# Altium PCB versi 1.0(1).PcbDoc (part 1 of 2)
Units mm, origin at the board's own origin, x right, y up, seen from the top; angles counter-clockwise.
Board outline 227.58 x 135.13 mm, 2 copper layers (Top Layer, Bottom Layer); 42 components, 49 nets, 314 pads, 39 vias.
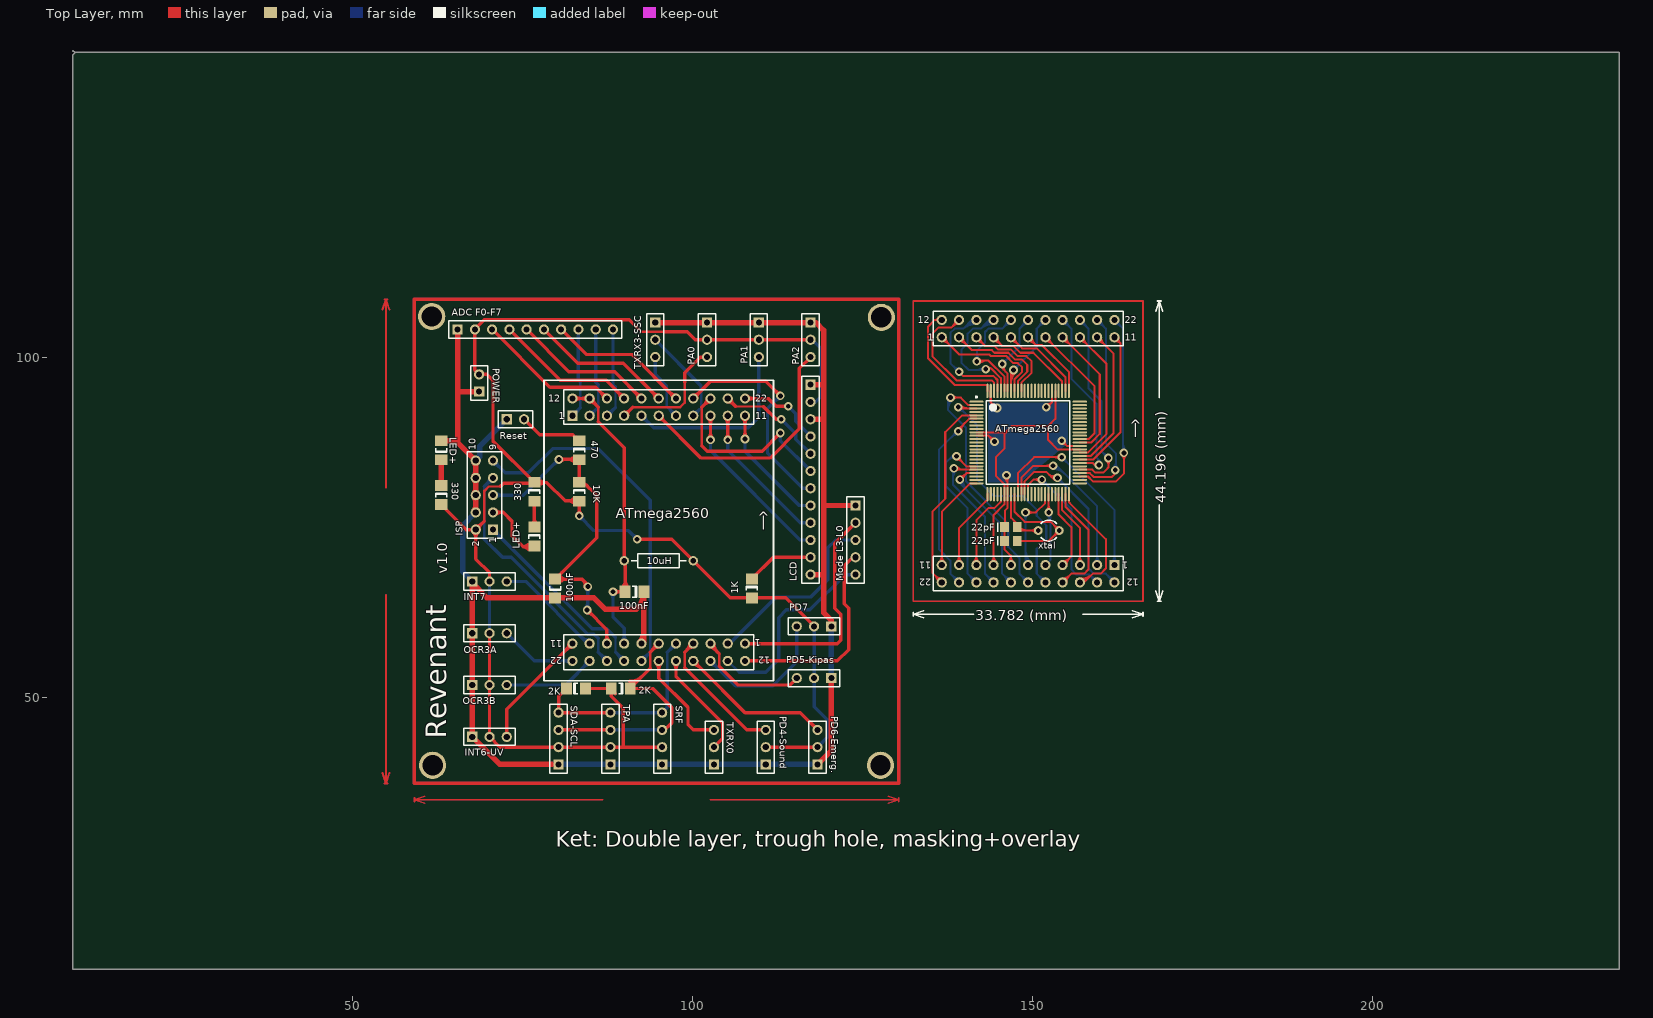
[diagram p0: Top Layer view]
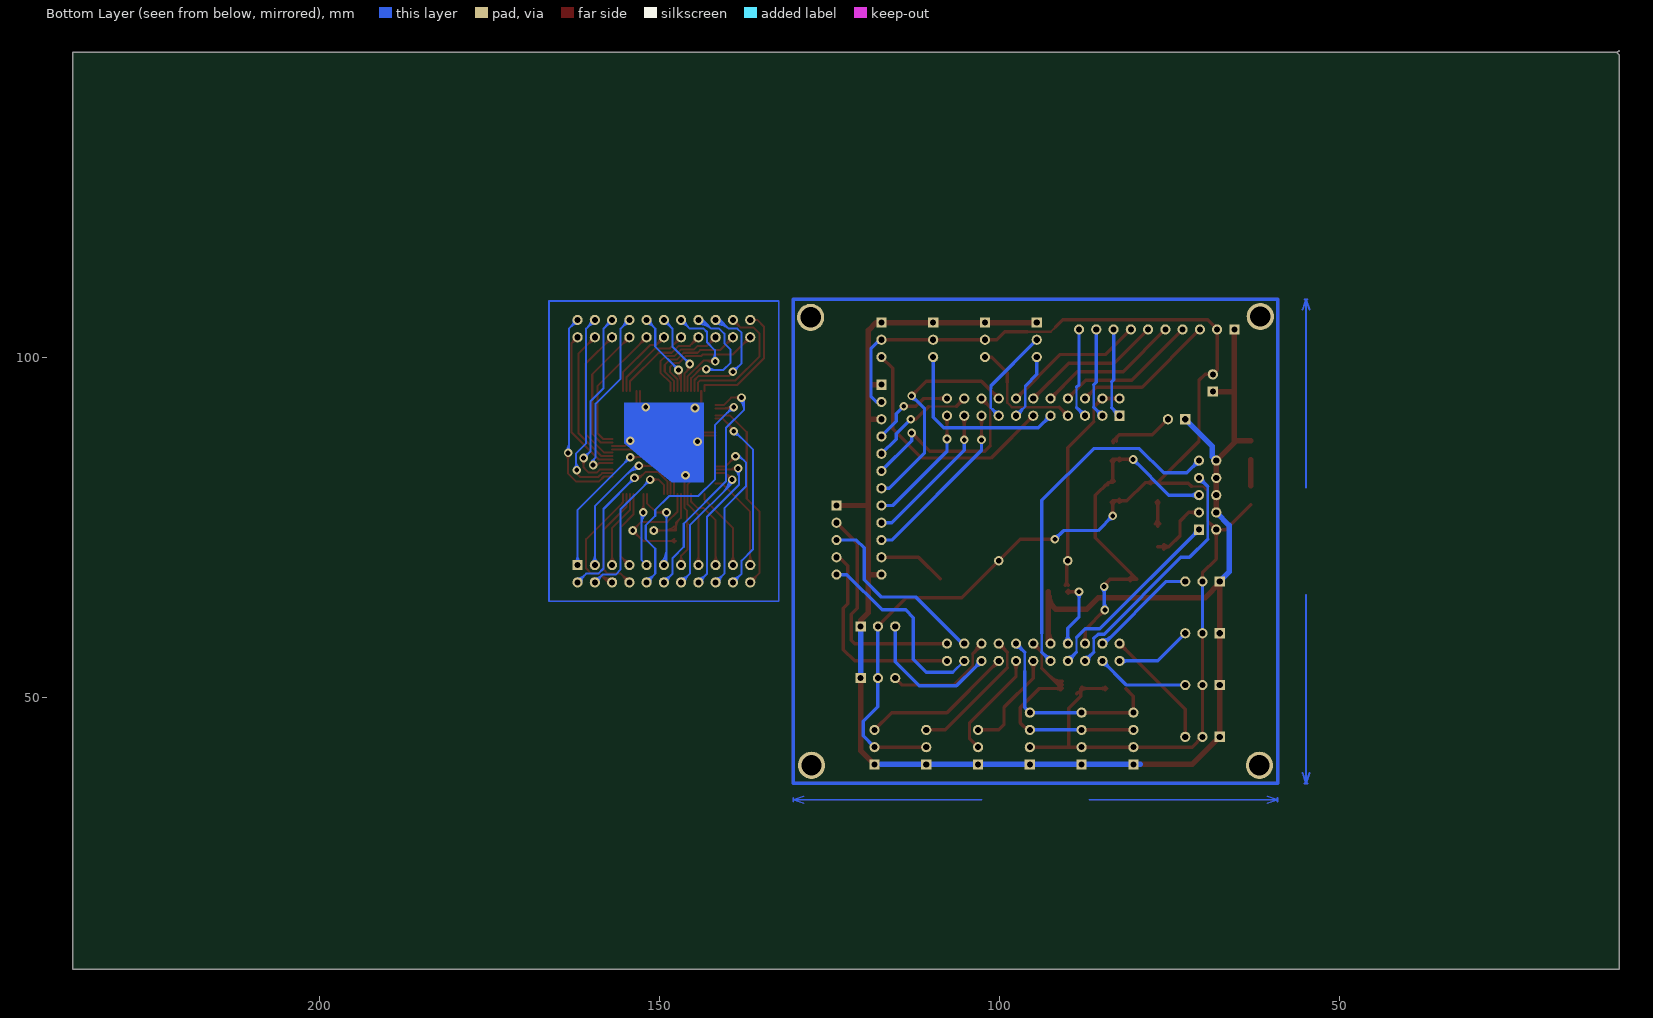
[diagram p1: Bottom Layer view, seen from below]

## Layer stack, top to bottom
Top Layer: signal copper 0.0356
Dielectric: dielectric 0.32, FR-4, Dk 4.8
Bottom Layer: signal copper 0.0356

## Board outline
9.144,144.907 8.763,144.526 8.763,10.033 236.347,10.033 236.347,144.907 9.017,144.907 8.763,145.161

## Design rules (kind name [scope] priority, off if disabled: settings)
Clearance [All] p1: gap=0.254
PolygonConnect [All] p1: connectstyle=Relief reliefconductorwidth=0.254 reliefentries=4 polygonreliefangle="90 Angle"
RoutingVias [All] p1: holewidth=0.711 width=1.27 viastyle="Through Hole" minholewidth=0.711 minwidth=1.27 maxholewidth=0.711 maxwidth=1.27
SilkscreenOverComponentPads [All] p1: minsilkscreentomaskgap=0.254
SolderMaskExpansion [All] p1: expansion=0.102
Width [All] p1: maxlimit=0.8 minlimit=0.35 preferedwidth=0.5 minimp=50.000000 maximp=50.000000 favimp=50.000000
27 further rules are at their usual default settings.

## Classes and differential pairs
component class Bawah: 100nF "ADC F0-F7" PD6-Emerg.

## Components (designator, comment, footprint, x,y, rotation, side; value= is the part's Value field where it differs from the comment)
1K "Res2" 1206 108.712,66.04 r270 top (schematic designator R.LCD)
2K "Res2" 1206 89.408,51.308 r180 top (schematic designator R.SCL)
2K "Res2" 1206 82.804,51.308 r0 top (schematic designator R.SDA)
10K "Res2" 1206 83.312,80.264 r270 top (schematic designator R.res1)
10uH "10uH" AXIAL-0.4 94.996,70.104 r0 top (schematic designator L)
22pF "" 0805 146.812,75.057 r0 top
22pF "Cap" 0805 146.812,73.025 r0 top (schematic designator 22pF1)
100nF "Cap" 1206 79.756,66.04 r90 top (schematic designator C.res)
100nF "Cap" 1206 91.44,65.532 r180 top (schematic designator C)
330 "Res2" 1206 76.708,80.264 r270 top (schematic designator R.ISP)
330 "Res2" 1206 62.992,79.756 r270 top (schematic designator R.Pow)
470 "Res2" 1206 83.312,86.36 r270 top (schematic designator R.res2)
"ADC F0-F7" "Header 10" HDR1X10 65.405,104.14 r0 top (schematic designator ADC)
ATmega2560 "ATmega2560-16AU" 100A_M 149.352,87.503 r0 top (schematic designator U1)
Header.A "Header 11X2A" HDR2X11_CEN#1 107.696,57.912 r180 top
Header.A "Header 11X2A" HDR2X11_CEN#2 162.052,69.469 r180 top
Header.B "Header 11X2A" HDR2X11_CEN#2 82.296,91.44 r0 top
Header.B "Header 11X2A" HDR2X11_CEN#1 136.652,102.997 r0 top
INT6-UV "Header 3" HDR1X3 67.564,44.196 r0 top (schematic designator UVTron)
INT7 "Header 3" HDR1X3 67.564,67.056 r0 top
ISP "ISP" HDR2X5 70.612,74.676 r90 top (schematic designator ISP_S1)
LCD "Header 12" HDR1X12 117.348,96.012 r270 top
LED+ "LED1" 1206 76.708,73.66 r270 top (schematic designator Led.ISP)
LED+ "LED1" 1206 62.992,86.36 r90 top (schematic designator Led.Pow)
"Mode L3-L0" "Header 4" HDR1X5 123.952,78.232 r270 top (schematic designator DIP.SW)
OCR3A "Header 3" HDR1X3 67.564,59.436 r0 top
OCR3B "Header 3" HDR1X3 67.564,51.816 r0 top
PA0 "Header 3" HDR1X3 102.108,105.156 r270 top
PA1 "Header 3" HDR1X3 109.728,105.156 r270 top
PA2 "Header 3" HDR1X3 117.348,105.156 r270 top
PD4-Sound "Header 3" HDR1X3 110.744,40.132 r90 top (schematic designator Sound)
PD5-Kipas "Header 3" HDR1X3 120.396,52.832 r180 top (schematic designator Kipas)
PD6-Emerg. "Header 3" HDR1X3 118.364,40.132 r90 top (schematic designator Emergency)
PD7 "Header 3" HDR1X3 120.396,60.452 r180 top
POWER "Header 2" HDR1X2 68.58,94.996 r90 top (schematic designator Switch)
Reset "SW-PB" HDR1X2 72.644,90.932 r0 top (schematic designator S1)
SDA-SCL "Header 4" HDR1X4 87.884,40.132 r90 top (schematic designator I2C)
SRF "Header 4" HDR1X4 95.504,40.132 r90 top
TPA "Header 4" HDR1X4 80.264,40.132 r90 top
TXRX0 "Header 3" HDR1X3 103.124,40.132 r90 top (schematic designator USART0)
TXRX3-SSC "Header 3" HDR1X3 94.488,105.156 r270 top (schematic designator SSC)
xtal "XTAL" BCY-W2/D3.1 152.4,74.549 r90 top (schematic designator kristal)

## Footprints (in the part's own frame and the unit in brackets; to place one, negate y for a bottom-side part, rotate by r counter-clockwise, add the part's x,y. Pads: shape width x height; smd on the part's side, far side on the other; paste and mask are expansions set on the pad)
100A_M [mm] "Thin QFP, 100-Leads, Body 14x14mm, Pitch 0.5mm, IPC Low Density"
  oval 2.1x0.3 smd: 1(-7.6,6) 2(-7.6,5.5) 3(-7.6,5) 4(-7.6,4.5) 5(-7.6,4) 6(-7.6,3.5) 7(-7.6,3) 8(-7.6,2.5) 9(-7.6,2) 10(-7.6,1.5) 11(-7.6,1) 12(-7.6,0.5) 13(-7.6,0) 14(-7.6,-0.5) 15(-7.6,-1) 16(-7.6,-1.5) 17(-7.6,-2) 18(-7.6,-2.5) 19(-7.6,-3) 20(-7.6,-3.5) 21(-7.6,-4) 22(-7.6,-4.5) 23(-7.6,-5) 24(-7.6,-5.5) 25(-7.6,-6) 51(7.6,-6) 52(7.6,-5.5) 53(7.6,-5) 54(7.6,-4.5) 55(7.6,-4) 56(7.6,-3.5) 57(7.6,-3) 58(7.6,-2.5) 59(7.6,-2) 60(7.6,-1.5) 61(7.6,-1) 62(7.6,-0.5) 63(7.6,0) 64(7.6,0.5) 65(7.6,1) 66(7.6,1.5) 67(7.6,2) 68(7.6,2.5) 69(7.6,3) 70(7.6,3.5) 71(7.6,4) 72(7.6,4.5) 73(7.6,5) 74(7.6,5.5) 75(7.6,6)
  oval 0.3x2.1 smd: 26(-6,-7.6) 27(-5.5,-7.6) 28(-5,-7.6) 29(-4.5,-7.6) 30(-4,-7.6) 31(-3.5,-7.6) 32(-3,-7.6) 33(-2.5,-7.6) 34(-2,-7.6) 35(-1.5,-7.6) 36(-1,-7.6) 37(-0.5,-7.6) 38(0,-7.6) 39(0.5,-7.6) 40(1,-7.6) 41(1.5,-7.6) 42(2,-7.6) 43(2.5,-7.6) 44(3,-7.6) 45(3.5,-7.6) 46(4,-7.6) 47(4.5,-7.6) 48(5,-7.6) 49(5.5,-7.6) 50(6,-7.6) 76(6,7.6) 77(5.5,7.6) 78(5,7.6) 79(4.5,7.6) 80(4,7.6) 81(3.5,7.6) 82(3,7.6) 83(2.5,7.6) 84(2,7.6) 85(1.5,7.6) 86(1,7.6) 87(0.5,7.6) 88(0,7.6) 89(-0.5,7.6) 90(-1,7.6) 91(-1.5,7.6) 92(-2,7.6) 93(-2.5,7.6) 94(-3,7.6) 95(-3.5,7.6) 96(-4,7.6) 97(-4.5,7.6) 98(-5,7.6) 99(-5.5,7.6) 100(-6,7.6)
  silkscreen extent -7.72,-6.15 6.15,6.82, body extent -7,-7 7,7, height 1.2
0805 [mm] "Chip Capacitor; Body 2.0 x 1.2 mm (LxW typ)"
  rect 1.3x1.5 smd: 1(-0.95,0) 2(0.95,0)
  silkscreen extent -1.9,-0.65 -1.9,0.65
1206 [mm] "Chip Capacitor; Body 3.2 x 1.6 mm (LxW typ)"
  rect 1.6x1.8 smd: 1(-1.4,0) 2(1.4,0)
  silkscreen extent -0.3,-0.8 0.3,0.8
AXIAL-0.4 [mm] "Axial Device, Thru-Hole; 2 Leads; 0.4 in Pin Spacing"
  round 1.4 hole 0.85: 1(-5.08,0) 2(5.08,0)
  silkscreen extent -4.06,-1.02 4.06,1.02
BCY-W2/D3.1 [mm] "Crystal, Thru-Hole; 2 Leads; Body 3.1 x 8.2 mm (Dia.xH)"
  round 1.3 hole 0.7: 1(0,1.55) 2(0,-1.55)
  silkscreen extent -1.55,-1.19 1.55,1.17
HDR1X2 [mm] "Connector; Header; 2 Position"
  rect 1.5x1.5 hole 0.9: 1(0,0)
  round 1.5 hole 0.9: 2(2.54,0)
  silkscreen extent -1.27,-1.27 3.81,1.27
HDR1X3 [mm] "Connector; Header; 3 Position"
  rect 1.5x1.5 hole 0.9: 1(0,0)
  round 1.5 hole 0.9: 2(2.54,0) 3(5.08,0)
  silkscreen extent -1.27,-1.27 6.35,1.27
HDR1X4 [mm] "Connector; Header; 4 Position"
  rect 1.5x1.5 hole 0.9: 1(0,0)
  round 1.5 hole 0.9: 2(2.54,0) 3(5.08,0) 4(7.62,0)
  silkscreen extent -1.27,-1.27 8.89,1.27
HDR1X5 [mm] "Connector; Header; 5 Position"
  rect 1.5x1.5 hole 0.9: 1(0,0)
  round 1.5 hole 0.9: 2(2.54,0) 3(5.08,0) 4(7.62,0) 5(10.16,0)
  silkscreen extent -1.27,-1.27 11.43,1.27
HDR1X10 [mm] "Connector; Header; 10 Position"
  rect 1.5x1.5 hole 0.9: 1(0,0)
  round 1.5 hole 0.9: 2(2.54,0) 3(5.08,0) 4(7.62,0) 5(10.16,0) 6(12.7,0) 7(15.24,0) 8(17.78,0) 9(20.32,0) 10(22.86,0)
  silkscreen extent -1.27,-1.27 24.13,1.27
HDR1X12 [mm] "Connector; Header; 12 Position"
  rect 1.5x1.5 hole 0.9: 1(0,0)
  round 1.5 hole 0.9: 2(2.54,0) 3(5.08,0) 4(7.62,0) 5(10.16,0) 6(12.7,0) 7(15.24,0) 8(17.78,0) 9(20.32,0) 10(22.86,0) 11(25.4,0) 12(27.94,0)
  silkscreen extent -1.27,-1.27 29.21,1.27
HDR2X5 [mm] "Connector; Header; 5x2 Position"
  rect 1.5x1.5 hole 0.9: 1(0,0)
  round 1.5 hole 0.9: 2(0,2.54) 3(2.54,0) 4(2.54,2.54) 5(5.08,0) 6(5.08,2.54) 7(7.62,0) 8(7.62,2.54) 9(10.16,0) 10(10.16,2.54)
  silkscreen extent -1.27,-1.27 11.43,3.81
HDR2X11_CEN#1 [mm] "Connector; Header; 11x2 Position"
  round 1.5 hole 0.9: 1(0,0) 2(2.54,0) 3(5.08,0) 4(7.62,0) 5(10.16,0) 6(12.7,0) 7(15.24,0) 8(17.78,0) 9(20.32,0) 10(22.86,0) 11(25.4,0) 12(0,2.54) 13(2.54,2.54) 14(5.08,2.54) 15(7.62,2.54) 16(10.16,2.54) 17(12.7,2.54) 18(15.24,2.54) 19(17.78,2.54) 20(20.32,2.54) 21(22.86,2.54) 22(25.4,2.54)
  silkscreen extent -1.27,-1.27 26.67,3.81
HDR2X11_CEN#2 [mm] "Connector; Header; 11x2 Position"
  rect 1.5x1.5 hole 0.9: 1(0,0)
  round 1.5 hole 0.9: 2(2.54,0) 3(5.08,0) 4(7.62,0) 5(10.16,0) 6(12.7,0) 7(15.24,0) 8(17.78,0) 9(20.32,0) 10(22.86,0) 11(25.4,0) 12(0,2.54) 13(2.54,2.54) 14(5.08,2.54) 15(7.62,2.54) 16(10.16,2.54) 17(12.7,2.54) 18(15.24,2.54) 19(17.78,2.54) 20(20.32,2.54) 21(22.86,2.54) 22(25.4,2.54)
  silkscreen extent -1.27,-1.27 26.67,3.81

## Part data
1K 2K 2K 10K 330 330 470: "Resistor"
10uH: library part INDUCTOR
22pF: library part Cap, "Capacitor"
22pF 100nF 100nF: "Capacitor"
"ADC F0-F7": "Header, 10-Pin"
ATmega2560: "8-bit AVR Microcontroller, 4.5-5.5V, 256KB Flash, 4KB EEPROM, 8KB SRAM, 86 GPIO pins, 100-pin TQFP, Industrial Grade (-40°C to 85°C), Pb-Free"
Header.A Header.A Header.B Header.B: "Header, 11-Pin, Dual row"
INT6-UV INT7 OCR3A OCR3B PA0 PA1 PA2 PD4-Sound PD5-Kipas PD6-Emerg. PD7 TXRX0 TXRX3-SSC: "Header, 3-Pin"
ISP: library part "Header 5X2", "Header, 5-Pin, Dual row"
LCD: "Header, 12-Pin"
LED+ LED+: "Typical RED GaAs LED"
"Mode L3-L0" SDA-SCL SRF TPA: "Header, 4-Pin"
POWER: "Header, 2-Pin"
Reset: "Switch"
xtal: "Crystal Oscillator"

## Free pads (board coordinates)
  round 4 hole 3: 2(61.595,106.045) 2(61.722,40.005) 2(127.635,40.005) 2(127.762,105.918)

## Via types
v1: diameter 1.27, hole 0.711, Top Layer to Bottom Layer, 39 vias

## Nets (pads, with @x,y where several pads share a name; then routed paths per layer and width w, separated by ;. In a path a pad name is that pad's centre, name@x,y a point inside that pad or via, vN(x,y) a via of type N, cw(c..) or ccw(c..) an arc to the next point about the centre after c; other vN are vias at no path point)
GND: 100nF.1 "ADC F0-F7.1" "Mode L3-L0.1" Header.A.7@92.456,57.912 INT6-UV.1 INT7.1 ISP.4 ISP.6 ISP.8 ISP.10 LCD.1 LCD.3 LCD.12 LED+.2@62.992,87.76 OCR3A.1 OCR3B.1 PA0.1 PA1.1 PA2.1 PD4-Sound.1 PD5-Kipas.1 PD6-Emerg..1 PD7.1 POWER.1 Reset.1 SDA-SCL.1 SRF.1 TPA.1 TXRX0.1 TXRX3-SSC.1 | length 275.1
  Top Layer w0.8: LED+.2@62.992,87.76 65.148,87.76 65.405,87.503 ; 65.405,104.14 65.405,94.996 ; INT7.1@67.564,67.056 INT7.1@67.564,66.802 ; ISP.4@67.825,77.463 ccw(c67.227,78.061) 68.072,78.061 ccw(c68.917,78.061) ISP.4@68.319,77.463 ; ISP.6@67.825,79.509 cw(c67.227,78.911) 68.072,78.911 cw(c68.917,78.911) ISP.6@68.319,79.509 ; ISP.6@67.825,80.003 ccw(c67.227,80.601) 68.072,80.601 ccw(c68.917,80.601) ISP.6@68.319,80.003 ; ISP.8@67.825,82.049 cw(c67.227,81.451) 68.072,81.451 cw(c68.917,81.451) ISP.8@68.319,82.049 ; ISP.8@67.825,82.543 ccw(c67.227,83.141) 68.072,83.141 ccw(c68.917,83.141) ISP.8@68.319,82.543 ; ISP.10@67.825,84.589 cw(c67.227,83.991) 68.072,83.991 cw(c68.917,83.991) ISP.10@68.319,84.589 ; ISP.4@68.072,77.216 ISP.6@68.072,79.756 ISP.8@68.072,82.296 ISP.10@68.072,84.836 65.405,87.503 ; POWER.1@68.58,94.996 65.405,94.996 ; 79.248,40.132 71.628,40.132 INT6-UV.1@67.564,44.196 OCR3B.1@67.564,51.816 OCR3A.1@67.564,59.436 INT7.1@67.564,66.802 ; 92.043,63.341 ccw(c90.602,64.782) 100nF.1@92.64,64.782 ; Header.A.7@92.209,58.159 ccw(c90.805,59.563) 92.79,59.563 ; Header.A.7@92.456,57.912 92.79,58.246 92.79,64.088 ; 100nF.1@92.79,65.532 92.79,64.088 ; TXRX3-SSC.1@94.488,105.156 PA0.1@102.108,105.156 PA1.1@109.728,105.156 PA2.1@117.348,105.156 118.11,105.156 119.253,104.013 119.253,96.139 ; LCD.12@117.348,68.072 119.126,68.072 119.253,67.945 ; LCD.3@117.348,90.932 119.253,90.932 ; LCD.1@117.348,96.012 119.126,96.012 119.253,96.139 ; PD6-Emerg..1@118.364,40.132 120.396,42.164 PD5-Kipas.1@120.396,52.832 ; PD7.1@120.396,60.452 120.396,61.341 119.253,62.484 119.253,67.945 ; 123.952,78.232 119.253,78.232 ; 65.405,87.503 65.405,94.996 ; INT7.1@67.564,66.802 69.676,64.69 85.424,64.69 87.122,62.992 91.694,62.992 92.79,64.088 ; 119.253,67.945 119.253,78.232 ; 119.253,78.232 119.253,90.932 ; 119.253,90.932 119.253,96.139
  Bottom Layer w0.8: INT7.1@67.564,67.056 66.167,68.453 66.167,75.311 ISP.4@68.072,77.216 ; ISP.10@68.072,85.186 ccw(c68.072,86.031) 68.669,85.433 ; ISP.10@68.422,84.836 cw(c69.267,84.836) 68.669,85.433 ; Reset.1@72.644,90.932 68.669,86.957 68.669,85.433 ; 79.248,40.132 86.868,40.132 94.488,40.132 102.108,40.132 109.728,40.132 117.348,40.132 ; PD5-Kipas.1@120.396,52.832 PD7.1@120.396,60.452
NetADC_3: "ADC F0-F7.3" Header.B.14@87.376,93.98 | length 23
  Top Layer w0.5: 70.485,104.14 78.994,95.631 85.725,95.631 Header.B.14@87.376,93.98 ; Header.B.14@86.876,93.98 ccw(c85.669,93.98) 86.522,94.834 ccw(c87.376,95.687) Header.B.14@87.376,94.48
NetADC_4: "ADC F0-F7.4" Header.B.15@89.916,93.98 | length 23
  Top Layer w0.5: 73.025,104.14 80.518,96.647 87.249,96.647 Header.B.15@89.916,93.98 ; Header.B.15@89.416,93.98 ccw(c88.209,93.98) 89.062,94.834 ccw(c89.916,95.687) Header.B.15@89.916,94.48
NetADC_5: "ADC F0-F7.5" Header.B.16@92.456,93.98 | length 23
  Top Layer w0.5: 75.565,104.14 81.788,97.917 88.519,97.917 Header.B.16@92.456,93.98 ; Header.B.16@91.956,93.98 ccw(c90.749,93.98) 91.602,94.834 ccw(c92.456,95.687) Header.B.16@92.456,94.48
NetADC_6: "ADC F0-F7.6" Header.B.17@94.996,93.98 | length 23
  Top Layer w0.5: 78.105,104.14 83.058,99.187 89.789,99.187 Header.B.17@94.996,93.98 ; Header.B.17@94.496,93.98 ccw(c93.289,93.98) 94.142,94.834 ccw(c94.996,95.687) Header.B.17@94.996,94.48
NetADC_7: "ADC F0-F7.7" Header.B.18@97.536,93.98 | length 23
  Top Layer w0.5: 80.645,104.14 84.328,100.457 91.059,100.457 Header.B.18@97.536,93.98 ; Header.B.18@97.036,93.98 ccw(c95.829,93.98) 96.682,94.834 ccw(c97.536,95.687) Header.B.18@97.536,94.48
NetADC_8: "ADC F0-F7.8" Header.B.1@82.296,91.44 | length 15.2
  Bottom Layer w0.35: 83.475,92.619 83.475,96.429
  Bottom Layer w0.5: Header.B.1@82.296,91.44 83.475,92.619 ; Header.B.1@82.296,91.94 ccw(c82.296,93.147) 83.15,92.294 ccw(c84.003,91.44) Header.B.1@82.796,91.44 ; 83.185,104.14 83.185,96.719 83.475,96.429
NetADC_9: "ADC F0-F7.9" Header.B.2@84.836,91.44 | length 15.3
  Bottom Layer w0.35: 86.106,92.71 86.106,96.012
  Bottom Layer w0.5: Header.B.2@84.836,91.44 86.106,92.71 ; Header.B.2@84.836,91.94 ccw(c84.836,93.147) 85.69,92.294 ccw(c86.543,91.44) Header.B.2@85.336,91.44 ; 85.725,104.14 85.725,96.393 86.106,96.012
NetADC_10: "ADC F0-F7.10" Header.B.3@87.376,91.44 | length 15.3
  Bottom Layer w0.35: 88.646,92.71 88.646,95.631
  Bottom Layer w0.5: Header.B.3@87.376,91.44 88.646,92.71 ; Header.B.3@87.376,91.94 ccw(c87.376,93.147) 88.23,92.294 ccw(c89.083,91.44) Header.B.3@87.876,91.44 ; 88.265,104.14 88.265,96.012 88.646,95.631
NetC.res_2: 10K.1 100nF.2@79.756,67.44 470.2 Header.A.9@87.376,57.912 ISP.5 | length 69.5
  Top Layer w0.5: 100nF.2@79.806,67.39 cw(c79.927,67.39) 100nF.2@79.841,67.475 ; 100nF.2@80.306,67.39 cw(c81.634,67.39) 80.695,68.329 ; v1(80.311,85.01) 83.312,85.01 83.312,81.614 83.994,81.614 85.852,79.756 85.852,73.486 79.756,67.39 83.74,67.39 v1@84.455,66.675 ; v1@80.583,84.738 cw(c81.24,84.081) 81.24,85.01 cw(c81.24,85.939) v1@80.583,85.282 ; 80.718,67.178 cw(c81.23,66.666) 81.23,67.39 cw(c81.23,68.114) 80.718,67.602 ; 82.35,84.798 ccw(c81.838,84.286) 81.838,85.01 ccw(c81.838,85.734) 82.35,85.222 ; 10K.1@83.1,81.826 ccw(c82.588,82.338) 83.312,82.338 ccw(c84.036,82.338) 10K.1@83.524,81.826 ; 470.2@83.1,84.798 cw(c82.588,84.286) 83.312,84.286 cw(c84.036,84.286) 470.2@83.524,84.798 ; 83.745,67.385 cw(c82.654,66.294) v1@84.197,66.294 ; 10K.1@84.062,81.314 cw(c84.062,80.754) 84.458,81.15 ; v1@84.455,62.48 cw(c84.455,61.551) 85.112,62.208 cw(c85.769,62.865) v1@84.84,62.865 ; v1(84.455,62.865) 87.376,59.944 Header.A.9@87.376,57.912 ; Header.A.9@87.022,58.266 ccw(c86.169,59.119) 87.376,59.119 ccw(c88.583,59.119) Header.A.9@87.73,58.266
  Bottom Layer w0.5: ISP.5@70.612,79.756 75.057,79.756 v1(80.311,85.01) ; ISP.5@70.966,79.402 cw(c71.819,78.549) 71.819,79.756 cw(c71.819,80.963) ISP.5@70.966,80.11 ; v1@79.926,85.01 cw(c78.997,85.01) 79.654,84.353 cw(c80.311,83.696) v1@80.311,84.625 ; v1@84.183,63.137 ccw(c83.219,64.101) 84.582,64.101 ; v1@84.31,66.022 cw(c83.653,65.365) 84.582,65.365 cw(c85.511,65.365) v1@84.854,66.022 ; v1(84.455,62.865) 84.582,62.992 v1(84.582,66.294) ; 84.582,63.488 ccw(c85.078,63.488) v1@84.727,63.137
NetC_2: 10uH.1 100nF.2@90.04,65.532 Header.A.8@89.916,57.912 Header.B.12@82.296,93.98 Header.B.13@84.836,93.98 | length 54.6
  Top Layer w0.35: 86.106,90.551 86.106,92.71
  Top Layer w0.5: Header.B.12@82.296,93.98 Header.B.13@84.836,93.98 86.106,92.71 ; Header.B.12@82.65,93.626 cw(c83.503,92.773) 83.503,93.98 cw(c83.503,95.187) Header.B.12@82.65,94.334 ; Header.B.13@84.482,93.626 ccw(c83.629,92.773) 83.629,93.98 ccw(c83.629,95.187) Header.B.13@84.482,94.334 ; Header.B.13@84.836,93.48 cw(c84.836,92.273) 85.69,93.126 cw(c86.543,93.98) Header.B.13@85.336,93.98 ; 86.106,90.551 89.877,86.78 89.916,86.741 10uH.1@89.916,70.104 90.09,69.93 90.09,67.006 ; v1(88.265,65.532) 100nF.2@90.09,65.532 ; v1@88.537,65.26 cw(c89.194,64.603) 89.194,65.532 cw(c89.194,66.461) v1@88.537,65.804 ; 100nF.2@89.878,65.32 ccw(c89.366,64.808) 89.366,65.532 ccw(c89.366,66.256) 100nF.2@89.878,65.744 ; 89.878,66.494 ccw(c89.366,67.006) 90.09,67.006 ; 90.302,66.494 cw(c90.814,67.006) 90.09,67.006
  Bottom Layer w0.5: v1@87.993,65.26 cw(c87.336,64.603) 88.265,64.603 cw(c89.194,64.603) v1@88.537,65.26 ; v1(88.265,65.532) 88.265,61.849 89.916,60.198 Header.A.8@89.916,57.912 ; Header.A.8@89.562,58.266 ccw(c88.709,59.119) 89.916,59.119 ccw(c91.123,59.119) Header.A.8@90.27,58.266
NetDIP.SW_1: "Mode L3-L0.2" Header.A.1@107.696,57.912 | length 33.2
  Top Layer w0.5: Header.A.1@107.696,57.912 121.285,57.912 121.793,58.42 121.793,62.23 120.904,63.119 120.904,72.644 123.952,75.692
NetDIP.SW_2: "Mode L3-L0.3" Header.A.2@105.156,57.912 | length 27.9
  Bottom Layer w0.5: Header.A.2@105.156,57.912 105.41,57.912 112.268,64.77 117.348,64.77 119.888,67.31 119.888,72.009 121.031,73.152 123.952,73.152
NetDIP.SW_3: "Mode L3-L0.4" Header.A.12@107.696,55.372 | length 30.7
  Top Layer w0.5: Header.A.12@107.696,55.372 121.285,55.372 122.936,57.023 122.936,63.119 122.301,63.754 122.301,69.342 123.571,70.612 123.952,70.612
NetDIP.SW_4: "Mode L3-L0.5" Header.A.13@105.156,55.372 | length 29
  Bottom Layer w0.35: Header.A.13@105.156,55.372 106.807,53.721
  Bottom Layer w0.5: 106.807,53.721 110.744,53.721 112.649,55.626 112.649,61.722 113.792,62.865 117.221,62.865 122.428,68.072 123.952,68.072
NetEmergency_3: Header.A.15@100.076,55.372 PD6-Emerg..3 | length 23.2
  Top Layer w0.5: Header.A.15@100.076,54.872 cw(c100.076,53.665) 100.93,54.518 ; Header.A.15@100.576,55.372 ccw(c101.783,55.372) 100.93,54.518 ; PD6-Emerg..3@118.364,45.212 115.824,47.752 107.696,47.752 100.93,54.518
NetHeader.A_3: Header.A.3@102.616,57.912 PD5-Kipas.3 | length 18.7
  Top Layer w0.35: 103.886,54.61 103.886,56.388
  Top Layer w0.5: Header.A.3@102.616,57.412 cw(c102.616,56.818) 103.036,57.238 ; Header.A.3@102.616,57.912 102.616,57.658 103.886,56.388 ; Header.A.3@103.116,57.912 ccw(c104.936,57.912) 103.649,56.625 ; 103.886,54.61 106.68,51.816 114.3,51.816 PD5-Kipas.3@115.316,52.832
NetHeader.A_4: Header.A.4@100.076,57.912 PD4-Sound.3 | length 21.7
  Top Layer w0.35: 98.806,54.356 98.806,56.642
  Top Layer w0.5: 98.806,54.356 107.95,45.212 PD4-Sound.3@110.744,45.212 ; 98.806,56.642 Header.A.4@100.076,57.912 ; Header.A.4@99.576,57.912 cw(c98.369,57.912) 99.222,57.058 cw(c100.076,56.205) Header.A.4@100.076,57.412
NetHeader.A_5: 2K.1@81.404,51.308 Header.A.5@97.536,57.912 SDA-SCL.4 SRF.4 TPA.4 | length 32.2
  Top Layer w0.5: 2K.1@81.404,51.308 80.264,50.168 TPA.4@80.264,47.752 SDA-SCL.4@87.884,47.752
  Bottom Layer w0.35: 96.266,53.848 96.266,56.642
  Bottom Layer w0.5: SDA-SCL.4@87.884,47.752 SRF.4@95.504,47.752 96.266,48.514 96.266,53.848 ; 96.266,56.642 Header.A.5@97.536,57.912 ; Header.A.5@97.036,57.912 cw(c95.829,57.912) 96.682,57.058 cw(c97.536,56.205) Header.A.5@97.536,57.412
NetHeader.A_6: 2K.1@90.808,51.308 Header.A.6@94.996,57.912 SDA-SCL.3 SRF.3 TPA.3 | length 40.8
  Top Layer w0.35: 93.726,54.276 93.726,56.642
  Top Layer w0.5: TPA.3@80.264,45.212 SDA-SCL.3@87.884,45.212 ; 2K.1@90.758,51.358 ccw(c90.758,51.479) 2K.1@90.843,51.393 ; 2K.1@90.758,51.858 ccw(c90.758,53.186) 91.697,52.247 ; 90.758,52.358 ccw(c90.758,54.893) 92.55,53.1 ; 2K.1@90.97,51.096 cw(c91.482,50.584) 91.482,51.308 cw(c91.482,52.032) 2K.1@90.97,51.52 ; 93.726,54.276 90.758,51.308 94.107,51.308 96.901,48.514 96.901,46.228 SRF.3@95.885,45.212 ; 93.726,56.642 Header.A.6@94.996,57.912 ; Header.A.6@94.496,57.912 cw(c93.289,57.912) 94.142,57.058 cw(c94.996,56.205) Header.A.6@94.996,57.412
  Bottom Layer w0.5: SDA-SCL.3@87.884,45.212 SRF.3@95.504,45.212
NetHeader.A_10: Header.A.10@84.836,57.912 INT7.3 | length 17.9
  Bottom Layer w0.5: INT7.3@72.644,67.056 75.438,67.056 75.509,66.985 84.582,57.912 Header.A.10@84.836,57.912 ; 83.549,58.945 ccw(c84.836,60.232) Header.A.10@84.836,58.412 ; 84.162,58.332 cw(c83.742,57.912) Header.A.10@84.336,57.912
NetHeader.A_11: Header.A.11@82.296,57.912 INT6-UV.3 | length 19.6
  Top Layer w0.5: INT6-UV.3@72.644,44.196 72.644,48.26 Header.A.11@82.296,57.912 ; Header.A.11@81.796,57.912 cw(c80.589,57.912) 81.442,57.058 cw(c82.296,56.205) Header.A.11@82.296,57.412
NetHeader.A_14: Header.A.14@102.616,55.372 PD7.3 | length 21.6
  Bottom Layer w0.5: Header.A.14@102.616,54.872 cw(c102.616,53.665) 103.47,54.518 ; Header.A.14@103.116,55.372 ccw(c104.323,55.372) 103.47,54.518 ; PD7.3@115.316,60.452 115.316,55.245 111.76,51.689 106.299,51.689 103.47,54.518
NetHeader.A_16: Header.A.16@97.536,55.372 TXRX0.2 | length 17.9
  Top Layer w0.5: Header.A.16@97.182,55.018 cw(c96.329,54.165) 97.536,54.165 cw(c98.743,54.165) Header.A.16@97.89,55.018 ; Header.A.16@97.536,55.372 97.536,53.086 104.378,46.244 104.378,43.926 TXRX0.2@103.124,42.672
NetHeader.A_17: Header.A.17@94.996,55.372 TXRX0.3 | length 17.2
  Top Layer w0.5: Header.A.17@94.642,55.018 cw(c93.789,54.165) 94.996,54.165 cw(c96.203,54.165) Header.A.17@95.35,55.018 ; Header.A.17@94.996,55.372 94.996,52.832 99.314,48.514 99.314,45.974 100.076,45.212 TXRX0.3@103.124,45.212
NetHeader.A_18: Header.A.18@92.456,55.372 ISP.9 | length 56.4
  Bottom Layer w0.35: 93.726,56.642 93.726,59.436
  Bottom Layer w0.5: ISP.9@70.612,84.336 cw(c70.612,83.129) 71.466,83.982 cw(c72.319,84.836) ISP.9@71.112,84.836 ; ISP.9@70.612,84.836 72.39,83.058 75.819,83.058 79.375,86.614 86.106,86.614 93.726,78.994 93.726,59.436 ; Header.A.18@92.456,55.372 93.726,56.642 ; Header.A.18@92.456,55.872 ccw(c92.456,57.079) 93.31,56.226 ccw(c94.163,55.372) Header.A.18@92.956,55.372
NetHeader.A_19: Header.A.19@89.916,55.372 ISP.1 | length 32.4
  Bottom Layer w0.35: 88.646,56.642 88.646,58.801
  Bottom Layer w0.5: ISP.1@70.612,74.176 cw(c70.612,72.969) 71.466,73.822 cw(c72.319,74.676) ISP.1@71.112,74.676 ; ISP.1@70.612,74.676 85.217,60.071 87.376,60.071 88.646,58.801 ; 88.646,56.642 Header.A.19@89.916,55.372 ; Header.A.19@89.416,55.372 ccw(c88.209,55.372) 89.062,56.226 ccw(c89.916,57.079) Header.A.19@89.916,55.872
NetHeader.A_20: Header.A.20@87.376,55.372 ISP.7 | length 40
  Bottom Layer w0.35: 69.342,73.279 69.342,81.026 ; 86.106,56.642 86.106,58.674
  Bottom Layer w0.5: 69.342,73.279 72.009,70.612 73.279,70.612 84.582,59.309 85.471,59.309 86.106,58.674 ; 69.342,81.026 ISP.7@70.612,82.296 ; ISP.7@70.112,82.296 cw(c68.905,82.296) 69.758,81.442 cw(c70.612,80.589) ISP.7@70.612,81.796 ; 86.106,56.642 Header.A.20@87.376,55.372 ; Header.A.20@86.876,55.372 ccw(c85.669,55.372) 86.522,56.226 ccw(c87.376,57.079) Header.A.20@87.376,55.872
NetHeader.A_21: Header.A.21@84.836,55.372 OCR3B.3 | length 15.6
  Bottom Layer w0.5: OCR3B.3@72.644,51.816 81.28,51.816 Header.A.21@84.836,55.372 ; Header.A.21@84.336,55.372 cw(c83.129,55.372) 83.982,54.518 cw(c84.836,53.665) Header.A.21@84.836,54.872
NetHeader.A_22: Header.A.22@82.296,55.372 OCR3A.3 | length 13.2
  Bottom Layer w0.5: OCR3A.3@72.644,59.436 76.708,55.372 Header.A.22@82.296,55.372 ; Header.A.22@81.942,55.018 ccw(c81.089,54.165) 81.089,55.372 ccw(c81.089,56.579) Header.A.22@81.942,55.726
NetHeader.B_4: Header.B.4@89.916,91.44 PA0.3 | length 20.3
  Top Layer w0.35: 91.186,92.71 98.171,92.71 98.806,93.345 98.806,96.393
  Top Layer w0.5: Header.B.4@89.916,91.44 91.186,92.71 ; Header.B.4@89.916,91.94 ccw(c89.916,93.147) 90.77,92.294 ccw(c91.623,91.44) Header.B.4@90.416,91.44 ; 98.806,96.393 98.806,97.79 101.092,100.076 PA0.3@102.108,100.076
NetHeader.B_5: Header.B.5@92.456,91.44 PA1.3 | length 29.4
  Bottom Layer w0.5: Header.B.5@92.456,90.94 cw(c92.456,89.733) 93.31,90.586 cw(c94.163,91.44) Header.B.5@92.956,91.44 ; Header.B.5@92.456,91.44 94.234,89.662 108.204,89.662 109.728,91.186 PA1.3@109.728,100.076
NetHeader.B_6: Header.B.6@94.996,91.44 PA2.3 | length 38.2
  Top Layer w0.5: Header.B.6@94.996,90.94 cw(c94.996,89.733) 95.85,90.586 cw(c96.703,91.44) Header.B.6@95.496,91.44 ; Header.B.6@94.996,91.44 101.219,85.217 111.379,85.217 115.697,89.535 115.697,98.425 PA2.3@117.348,100.076
NetHeader.B_7: Header.B.7@97.536,91.44 TXRX3-SSC.3 | length 10.6
  Bottom Layer w0.35: 96.139,95.885 96.175,95.849 96.175,92.801 96.682,92.294
  Bottom Layer w0.5: TXRX3-SSC.3@94.488,100.076 94.488,97.536 96.139,95.885 ; Header.B.7@97.036,91.44 ccw(c95.829,91.44) 96.682,92.294 ccw(c97.536,93.147) Header.B.7@97.536,91.94
NetHeader.B_8: Header.B.8@100.076,91.44 TXRX3-SSC.2 | length 15.2
  Bottom Layer w0.35: 100.93,92.294 101.255,92.619 101.255,95.468 101.219,95.504
  Bottom Layer w0.5: TXRX3-SSC.2@94.488,102.616 101.219,95.885 101.219,95.504 ; Header.B.8@100.076,91.94 ccw(c100.076,93.147) 100.93,92.294 ccw(c101.783,91.44) Header.B.8@100.576,91.44
NetHeader.B_9: Header.B.9@102.616,91.44 LCD.10 | length 28.4
  Top Layer w0.5: Header.B.9@102.262,91.086 cw(c101.409,90.233) 102.616,90.233 cw(c103.823,90.233) Header.B.9@102.97,91.086 ; v1@102.344,88.156 ccw(c101.687,88.813) 102.616,88.813 ccw(c103.545,88.813) v1@102.888,88.156 ; v1@102.616,88.138 Header.B.9@102.616,91.44
  Bottom Layer w0.5: v1(102.616,87.884) 102.616,86.36 115.824,73.152 LCD.10@117.348,73.152
NetHeader.B_10: Header.B.10@105.156,91.44 LCD.9 | length 25.3
  Top Layer w0.5: Header.B.10@104.802,91.086 cw(c103.949,90.233) 105.156,90.233 cw(c106.363,90.233) Header.B.10@105.51,91.086 ; v1@104.884,88.156 ccw(c104.227,88.813) 105.156,88.813 ccw(c106.085,88.813) v1@105.428,88.156 ; v1(105.156,87.884) v1@105.156,88.392 ; v1@105.156,88.265 v1@105.156,88.392 ; 105.156,88.519 v1@105.156,88.392 ; Header.B.10@105.156,91.44 v1@105.156,88.392
  Bottom Layer w0.5: v1(105.156,87.884) 105.156,86.36 115.824,75.692 LCD.9@117.348,75.692
NetHeader.B_11: Header.B.11@107.696,91.44 LCD.8 | length 22.5
  Top Layer w0.5: Header.B.11@107.342,91.086 cw(c106.489,90.233) 107.696,90.233 cw(c108.903,90.233) Header.B.11@108.05,91.086 ; v1@107.424,88.283 ccw(c106.767,88.94) 107.696,88.94 ccw(c108.625,88.94) v1@107.968,88.283 ; v1(107.696,88.011) Header.B.11@107.696,91.44
  Bottom Layer w0.5: 107.696,87.376 v1(107.696,88.011) ; v1@107.696,88.392 v1(107.696,88.011) ; LCD.8@117.348,78.232 115.697,78.232 107.696,86.233 v1(107.696,88.011)
NetHeader.B_19: Header.B.19@100.076,93.98 LCD.7 | length 37.3
  Top Layer w0.5: Header.B.19@100.076,93.98 102.616,96.52 110.744,96.52 v1(112.903,94.361) ; Header.B.19@100.076,94.48 ccw(c100.076,95.687) 100.93,94.834 ccw(c101.783,93.98) Header.B.19@100.576,93.98 ; v1@112.518,94.361 ccw(c111.589,94.361) 112.246,95.018 ccw(c112.903,95.675) v1@112.903,94.746
  Bottom Layer w0.5: v1@112.518,94.361 cw(c111.589,94.361) 112.246,93.704 cw(c112.903,93.047) v1@112.903,93.976 ; v1(112.903,94.361) 110.998,92.456 110.998,85.979 116.205,80.772 LCD.7@117.348,80.772
NetHeader.B_20: Header.B.20@102.616,93.98 LCD.6 | length 29.8
  Top Layer w0.35: 101.346,86.995 101.346,92.71
  Top Layer w0.5: 101.346,86.995 102.108,86.233 110.236,86.233 v1(112.903,88.9) ; 101.346,92.71 Header.B.20@102.616,93.98 ; Header.B.20@102.116,93.98 cw(c100.909,93.98) 101.762,93.126 cw(c102.616,92.273) Header.B.20@102.616,93.48
  Bottom Layer w0.5: v1(112.903,88.9) 112.903,87.757 LCD.6@117.348,83.312
NetHeader.B_21: Header.B.21@105.156,93.98 LCD.5 | length 17.9
  Top Layer w0.35: 106.335,92.801 110.399,92.801
  Top Layer w0.5: Header.B.21@105.156,93.48 cw(c105.156,92.273) 106.01,93.126 cw(c106.863,93.98) Header.B.21@105.656,93.98 ; Header.B.21@105.156,93.98 106.335,92.801 ; 110.399,92.801 112.268,90.932 v1(113.03,90.932)
  Bottom Layer w0.5: v1(113.03,90.932) 115.189,88.773 115.189,88.011 LCD.5@117.348,85.852
NetHeader.B_22: Header.B.22@107.696,93.98 LCD.4 | length 16.2
  Top Layer w0.5: Header.B.22@107.696,93.98 111.125,93.98 112.268,92.837 v1(114.046,92.837) v1@114.3,92.837 ; Header.B.22@108.05,93.626 cw(c108.903,92.773) 108.903,93.98 cw(c108.903,95.187) Header.B.22@108.05,94.334 ; v1@114.028,92.565 ccw(c113.371,91.908) 113.371,92.837 ccw(c113.371,93.766) v1@114.028,93.109
  Bottom Layer w0.5: v1(114.046,92.837) 115.149,91.734 115.149,90.642 117.348,88.442 LCD.4@117.348,88.392
NetISP_S1_3: ISP.3 LED+.2@76.708,72.26 | length 13
  Top Layer w0.5: ISP.3@70.612,77.216 72.136,77.216 73.406,75.946 73.406,73.787 75.033,72.16 ; ISP.3@70.966,76.862 cw(c71.819,76.009) 71.819,77.216 cw(c71.819,78.423) ISP.3@70.966,77.57 ; 75.787,71.825 ccw(c75.033,71.144) 75.033,72.16 ; 75.787,72.495 cw(c75.033,73.176) 75.033,72.16 ; LED+.2@76.708,72.16 75.033,72.16
NetLCD_11: 1K.1 LCD.11 | length 9.9
  Top Layer w0.5: 1K.1@108.712,67.44 111.884,70.612 LCD.11@117.348,70.612